# Allegro board AGET_ERNI2HRS.brd
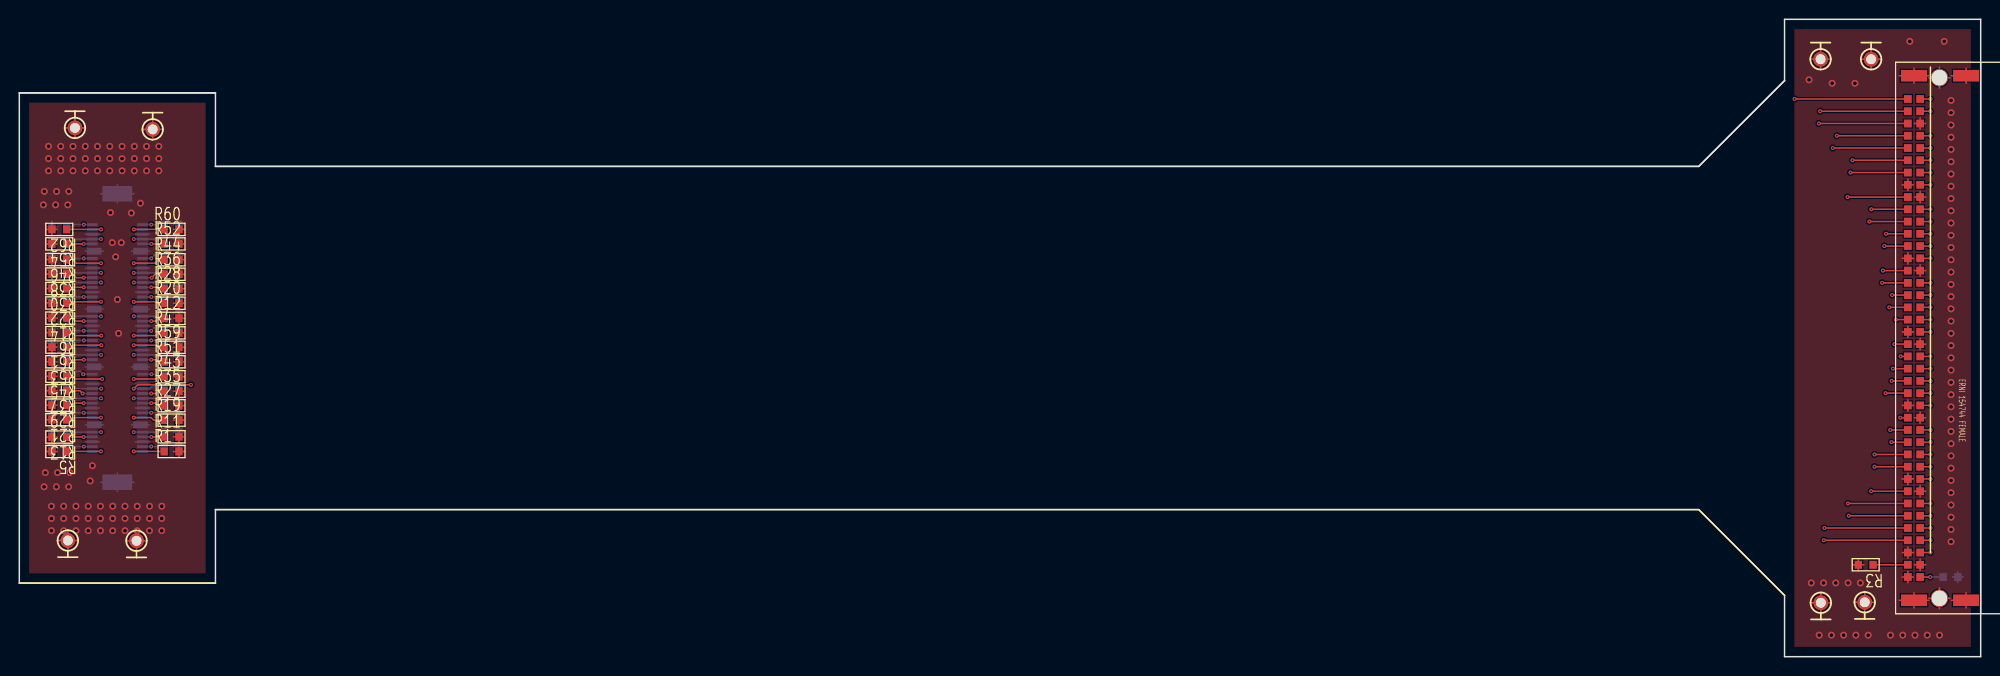
[diagram p0: board, top side]
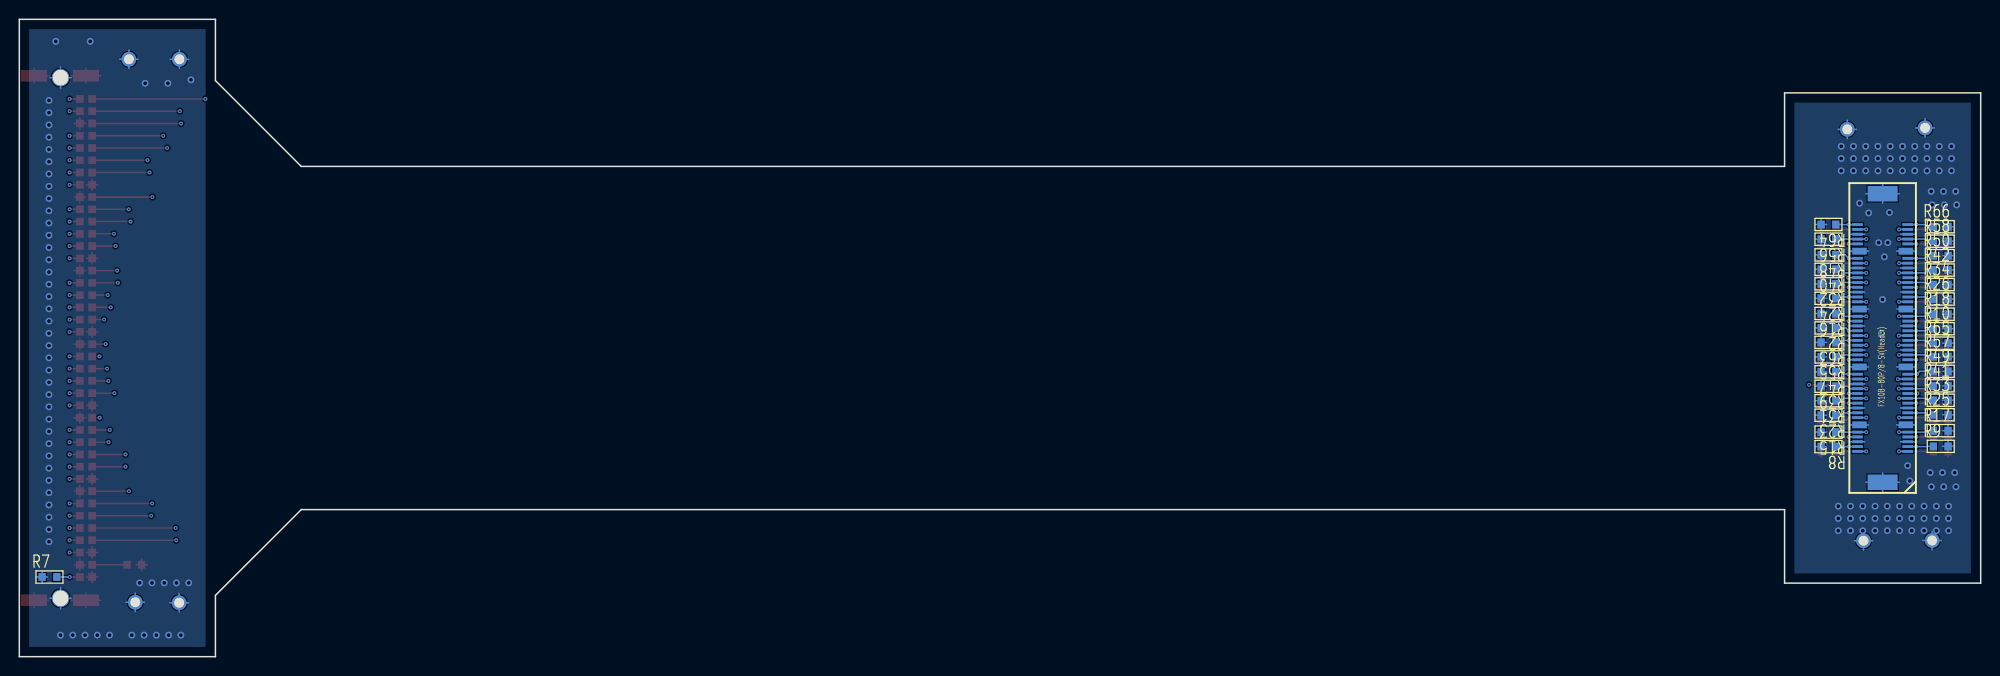
[diagram p1: board, bottom side, seen from below]

Outline 203.2 x 66.04 mm; copper layers: TOP, SIG1, GND1, GND2, SIG2, BOTTOM. Coordinates in mm from the lower left corner of the outline.
Outline path: 0,58.42 0,7.62 20.32,7.62 20.32,15.24 173.99,15.24 182.88,6.35 182.88,0 203.2,0 203.2,66.04 182.88,66.04 182.88,59.69 173.99,50.8 20.32,50.8 20.32,58.42 0,58.42

## Placement (name value [footprint] x y rotation side)
J1  CONN  [ERNI154744FEMALECONNECTOR]  196.93 57.78 0 top
R1  1M  [SR0603]  15.77 21.26 0 top
R2  1M  [SR0603]  15.77 34.06 0 bottom
R3  x  [SR0603]  191.29 9.53 180 top
R4  1M  [SR0603]  15.77 33.55 0 top
R5  1M  [SR0603]  4.14 21.26 180 top
R6  1M  [SR0603]  4.14 33.58 180 top
R7  x  [SR0603]  200.08 8.26 180 bottom
R8  1M  [SR0603]  15.77 21.77 0 bottom
R9  1M  [SR0603]  4.14 21.79 180 bottom
R10  1M  [SR0603]  4.14 33.99 180 bottom
R11  1M  [SR0603]  15.77 22.78 0 top
R12  1M  [SR0603]  15.77 35.05 0 top
R13  1M  [SR0603]  4.14 22.76 180 top
R14  1M  [SR0603]  4.14 35.08 180 top
R15  1M  [SR0603]  15.77 23.27 0 bottom
R16  1M  [SR0603]  15.77 35.56 0 bottom
R17  1M  [SR0603]  4.14 23.42 180 bottom
R18  1M  [SR0603]  4.14 35.48 180 bottom
R19  1M  [SR0603]  15.77 24.51 0 top
R20  1M  [SR0603]  15.77 36.63 0 top
R21  1M  [SR0603]  4.14 24.56 180 top
R22  1M  [SR0603]  4.14 36.65 180 top
R23  1M  [SR0603]  15.77 25.02 0 bottom
R24  1M  [SR0603]  15.77 37.13 0 bottom
R25  1M  [SR0603]  4.14 25.07 180 bottom
R26  1M  [SR0603]  4.14 37.06 180 bottom
R27  1M  [SR0603]  15.77 26.01 0 top
R28  1M  [SR0603]  15.77 38.13 0 top
R29  1M  [SR0603]  4.14 26.06 180 top
R30  1M  [SR0603]  4.14 38.15 180 top
R31  1M  [SR0603]  15.77 26.52 0 bottom
R32  1M  [SR0603]  15.77 38.63 0 bottom
R33  1M  [SR0603]  4.14 26.57 180 bottom
R34  1M  [SR0603]  4.14 38.56 180 bottom
R35  1M  [SR0603]  15.77 27.51 0 top
R36  1M  [SR0603]  15.77 39.62 0 top
R37  1M  [SR0603]  4.14 27.56 180 top
R38  1M  [SR0603]  4.14 39.65 180 top
R39  1M  [SR0603]  15.77 28.02 0 bottom
R40  1M  [SR0603]  15.77 40.13 0 bottom
R41  1M  [SR0603]  4.14 28.07 180 bottom
R42  1M  [SR0603]  4.14 40.06 180 bottom
R43  1M  [SR0603]  15.77 29.01 0 top
R44  1M  [SR0603]  15.77 41.12 0 top
R45  1M  [SR0603]  4.14 29.06 180 top
R46  1M  [SR0603]  4.14 41.15 180 top
R47  1M  [SR0603]  15.77 29.51 0 bottom
R48  1M  [SR0603]  15.77 41.63 0 bottom
R49  1M  [SR0603]  4.14 29.57 180 bottom
R50  1M  [SR0603]  4.14 41.55 180 bottom
R51  1M  [SR0603]  15.77 30.56 0 top
R52  1M  [SR0603]  15.77 42.77 0 top
R53  1M  [SR0603]  4.14 30.56 180 top
R54  1M  [SR0603]  4.14 42.77 180 top
R55  1M  [SR0603]  15.77 31.06 0 bottom
R56  1M  [SR0603]  15.77 43.26 0 bottom
R57  1M  [SR0603]  4.14 31.09 180 bottom
R58  1M  [SR0603]  4.14 43.05 180 bottom
R59  1M  [SR0603]  15.77 32.05 0 top
R60  1M  [SR0603]  15.77 44.27 0 top
R61  1M  [SR0603]  4.14 32.08 180 top
R62  1M  [SR0603]  4.14 44.27 180 top
R63  1M  [SR0603]  15.77 32.56 0 bottom
R64  1M  [SR0603]  15.77 44.78 0 bottom
R65  1M  [SR0603]  4.14 32.49 180 bottom
R66  1M  [SR0603]  4.14 44.55 180 bottom
TP1  GND  [TP_40MIL]  191.85 61.9 0 top
TP2  GND  [TP_40MIL]  5.03 12.04 180 top
TP3  GND  [TP_40MIL]  12.14 12.01 180 top
TP4  GND  [TP_40MIL]  5.77 54.79 0 top
TP5  GND  [TP_40MIL]  13.82 54.64 0 top
TP6  GND  [TP_40MIL]  186.61 61.9 0 top
TP7  GND  [TP_40MIL]  186.64 5.59 180 top
TP8  GND  [TP_40MIL]  191.19 5.64 180 top
U1  FX10B-80S8-SV-Header  [FX10B-80P8-SV-HEADER]  7.01 17.27 90 bottom

## Library data of the parts
J1 = CONN_1
R1 R2 R4-R6 R8-R66 = Resistor
R3 R7 = R
TP1-TP8 = T POINT A
U1 = FX10B-80S8-SV-Header

## Footprints (pads in the part's own frame, mm; a bottom-side part is the same pattern mirrored in y, then rotated)
ERNI154744FEMALECONNECTOR
  rect 2.7x1.199 smd: 1(-0.635,2.41) 2(4.765,2.41) 3(-0.635,-51.94) 4(4.765,-51.94)
  round 1.801 hole 1.6: 5(1.999,2.21) 6(1.999,-51.74)
  rect 0.8x0.8 smd: A1(0,-49.53) A2(0,-48.26) A3(0,-46.99) A4(0,-45.72) A5(0,-44.45) A6(0,-43.18) A7(0,-41.91) A8(0,-40.64) A9(0,-39.37) A10(0,-38.1) A11(0,-36.83) A12(0,-35.56) A13(0,-34.29) A14(0,-33.02) A15(0,-31.75) A16(0,-30.48) A17(0,-29.21) A18(0,-27.94) A19(0,-26.67) A20(0,-25.4) A21(0,-24.13) A22(0,-22.86) A23(0,-21.59) A24(0,-20.32) A25(0,-19.05) A26(0,-17.78) A27(0,-16.51) A28(0,-15.24) A29(0,-13.97) A30(0,-12.7) A31(0,-11.43) A32(0,-10.16) A33(0,-8.89) A34(0,-7.62) A35(0,-6.35) A36(0,-5.08) A37(0,-3.81) A38(0,-2.54) A39(0,-1.27) A40(0,0) B1(-1.27,-49.53) B2(-1.27,-48.26) B3(-1.27,-46.99) B4(-1.27,-45.72) B5(-1.27,-44.45) B6(-1.27,-43.18) B7(-1.27,-41.91) B8(-1.27,-40.64) B9(-1.27,-39.37) B10(-1.27,-38.1) B11(-1.27,-36.83) B12(-1.27,-35.56) B13(-1.27,-34.29) B14(-1.27,-33.02) B15(-1.27,-31.75) B16(-1.27,-30.48) B17(-1.27,-29.21) B18(-1.27,-27.94) B19(-1.27,-26.67) B20(-1.27,-25.4) B21(-1.27,-24.13) B22(-1.27,-22.86) B23(-1.27,-21.59) B24(-1.27,-20.32) B25(-1.27,-19.05) B26(-1.27,-17.78) B27(-1.27,-16.51) B28(-1.27,-15.24) B29(-1.27,-13.97) B30(-1.27,-12.7) B31(-1.27,-11.43) B32(-1.27,-10.16) B33(-1.27,-8.89) B34(-1.27,-7.62) B35(-1.27,-6.35) B36(-1.27,-5.08) B37(-1.27,-3.81) B38(-1.27,-2.54) B39(-1.27,-1.27) B40(-1.27,0)
FX10B-80P8-SV-HEADER
  rect 0.3x1.1 smd: 1(4,5.751) 2(4,0.551) 3(4.501,5.751) 4(4.501,0.551) 5(5.001,5.751) 6(5.001,0.551) 7(5.499,5.751) 8(5.499,0.551) 9(5.999,5.751) 10(5.999,0.551) 13(7.501,5.751) 14(7.501,0.551) 15(8.001,5.751) 16(8.001,0.551) 17(8.499,5.751) 18(8.499,0.551) 19(8.999,5.751) 20(8.999,0.551) 21(9.5,5.751) 22(9.5,0.551) 23(10,5.751) 24(10,0.551) 25(10.5,5.751) 26(10.5,0.551) 27(11.001,5.751) 28(11.001,0.551) 29(11.501,5.751) 30(11.501,0.551) 31(11.999,5.751) 32(11.999,0.551) 35(13.5,5.751) 36(13.5,0.551) 37(14,5.751) 38(14,0.551) 39(14.501,5.751) 40(14.501,0.551) 41(15.001,5.751) 42(15.001,0.551) 43(15.499,5.751) 44(15.499,0.551) 45(15.999,5.751) 46(15.999,0.551) 47(16.5,5.751) 48(16.5,0.551) 49(17,5.751) 50(17,0.551) 51(17.501,5.751) 52(17.501,0.551) 53(18.001,5.751) 54(18.001,0.551) 57(19.5,5.751) 58(19.5,0.551) 59(20,5.751) 60(20,0.551) 61(20.5,5.751) 62(20.5,0.551) 63(21.001,5.751) 64(21.001,0.551) 65(21.501,5.751) 66(21.501,0.551) 67(21.999,5.751) 68(21.999,0.551) 69(22.499,5.751) 70(22.499,0.551) 71(23,5.751) 72(23,0.551) 73(23.5,5.751) 74(23.5,0.551) 75(24,5.751) 76(24,0.551) 79(25.499,5.751) 80(25.499,0.551) 81(25.999,5.751) 82(25.999,0.551) 83(26.5,5.751) 84(26.5,0.551) 85(27,5.751) 86(27,0.551) 87(27.501,5.751) 88(27.501,0.551)
  rect 0.701x1.501 smd: 11(6.749,5.55) 12(6.749,0.749) 33(12.751,5.55) 34(12.751,0.749) 55(18.75,5.55) 56(18.75,0.749) 77(24.75,5.55) 78(24.75,0.749)
  rect 1.6x3.099 smd: B1(0.8,3.15) B2(30.701,3.15)
SR0603
  rect 0.762x0.813 smd: 1(-0.762,0) 2(0.762,0)
TP_40MIL
  round 1.524 hole 1.016: 1(0,0)

## Nets
GND: J1.1(GND#1) J1.2(GND#2) J1.3(GND#3) J1.4(GND#4) J1.5(GND#5) J1.6(GND#6) J1.A2 J1.A8 J1.A14 J1.A20 J1.A26 J1.A32 J1.A38 J1.B1 J1.B3 J1.B9 J1.B15 J1.B21 J1.B27 J1.B33 R1.2 R2.2 R3.2 R4.2 R5.2 R6.2 R7.1 R8.2 R9.2 R10.2 R11.2 R12.2 R13.2 R14.2 R15.2 R16.2 R17.2 R18.2 R19.2 R20.2 R21.2 R22.2 R23.2 R24.2 R25.2 R26.2 R27.2 R28.2 R29.2 R30.2 R31.2 R32.2 R33.2 R34.2 R35.2 R36.2 R37.2 R38.2 R39.2 R40.2 R41.2 R42.2 R43.2 R44.2 R45.2 R46.2 R47.2 R48.2 R49.2 R50.2 R51.2 R52.2 R53.2 R54.2 R55.2 R56.2 R57.2 R58.2 R59.2 R60.2 R61.2 R62.2 R63.2 R64.2 R65.2 R66.2 TP1.1(TP) TP2.1(TP) TP3.1(TP) TP4.1(TP) TP5.1(TP) TP6.1(TP) TP7.1(TP) TP8.1(TP) U1.5 U1.6 U1.11(GND1) U1.12(GND1-1) U1.17 U1.18 U1.27 U1.28 U1.33(GND2) U1.34(GND2-2) U1.39 U1.40 U1.49 U1.50 U1.55(GND3) U1.56(GND3-3) U1.61 U1.62 U1.71 U1.72 U1.77(GND4) U1.78(GND4-4) U1.83 U1.84 U1.B1(PAD1) U1.B2(PAD2)
INA_01: J1.A3 R1.1 U1.1
INA_02: J1.B4 R5.1 U1.2
INA_03: J1.A4 R8.1 U1.3
INA_04: J1.B5 R9.1 U1.4
INA_05: J1.A5 R11.1 U1.7
INA_06: J1.B6 R13.1 U1.8
INA_07: J1.A6 R15.1 U1.9
INA_08: J1.B7 R17.1 U1.10
INA_09: J1.A7 R19.1 U1.13
INA_10: J1.B8 R21.1 U1.14
INA_11: J1.A9 R23.1 U1.15
INA_12: J1.B10 R25.1 U1.16
INA_13: J1.A10 R27.1 U1.19
INA_14: J1.B11 R29.1 U1.20
INA_15: J1.A11 R31.1 U1.21
INA_16: J1.B12 R33.1 U1.22
INA_17: J1.A12 R35.1 U1.23
INA_18: J1.B13 R37.1 U1.24
INA_19: J1.A13 R39.1 U1.25
INA_20: J1.B14 R41.1 U1.26
INA_21: J1.A15 R43.1 U1.29
INA_22: J1.B16 R45.1 U1.30
INA_23: J1.A16 R47.1 U1.31
INA_24: J1.B17 R49.1 U1.32
INA_25: J1.A17 R51.1 U1.35
INA_26: J1.B18 R53.1 U1.36
INA_27: J1.A18 R55.1 U1.37
INA_28: J1.B19 R57.1 U1.38
INA_29: J1.A19 R59.1 U1.41
INA_30: J1.B20 R61.1 U1.42
INA_31: J1.A21 R63.1 U1.43
INA_32: J1.B22 R65.1 U1.44
INA_33: J1.A22 R4.1 U1.45
INA_34: J1.B23 R6.1 U1.46
INA_35: J1.A23 R2.1 U1.47
INA_36: J1.B24 R10.1 U1.48
INA_37: J1.A24 R12.1 U1.51
INA_38: J1.B25 R14.1 U1.52
INA_39: J1.A25 R16.1 U1.53
INA_40: J1.B26 R18.1 U1.54
INA_41: J1.A27 R20.1 U1.57
INA_42: J1.B28 R22.1 U1.58
INA_43: J1.A28 R24.1 U1.59
INA_44: J1.B29 R26.1 U1.60
INA_45: J1.A29 R28.1 U1.63
INA_46: J1.B30 R30.1 U1.64
INA_47: J1.A30 R32.1 U1.65
INA_48: J1.B31 R34.1 U1.66
INA_49: J1.A31 R36.1 U1.67
INA_50: J1.B32 R38.1 U1.68
INA_51: J1.A33 R40.1 U1.69
INA_52: J1.B34 R42.1 U1.70
INA_53: J1.A34 R44.1 U1.73
INA_54: J1.B35 R46.1 U1.74
INA_55: J1.A35 R48.1 U1.75
INA_56: J1.B36 R50.1 U1.76
INA_57: J1.A36 R52.1 U1.79
INA_58: J1.B37 R54.1 U1.80
INA_59: J1.A37 R56.1 U1.81
INA_60: J1.B38 R58.1 U1.82
INA_61: J1.A39 R60.1 U1.85
INA_62: J1.B39 R62.1 U1.86
INA_63: J1.A40 R64.1 U1.87
INA_64: J1.B40 R66.1 U1.88
N01819: J1.A1 R7.2
N01997: J1.B2 R3.1

## Via types
v1: diameter 0.406, hole 0.203, TOP to BOTTOM, 130 vias
v2: diameter 0.711, hole 0.406, TOP to BOTTOM, 139 vias

## Routing (per net, layer and track width the routed paths; a pad name or vN(x,y) marks a point on that pad's centre or on a via; arc(x,y) is an arc through that point)
GND: length 325.2
  TOP w0.152: 3.38,26.97 R37.2 ; R37.2 2.82,27.56 ; R37.2 3.94,27.56 ; R37.2 3.38,28.15 ; 2.82,38.15 R30.2 ; R30.2 3.38,37.56 ; R30.2 3.38,38.74 ; R30.2 3.94,38.15 ; J1.B21 195.66,34.24 ; J1.B21 196.24,33.66 ; J1.B21 195.66,33.07 ; J1.B21 195.07,33.66 ; 15.97,33.55 R4.2 ; R4.2 17.1,33.55 ; R4.2 16.54,32.97 ; R4.2 16.54,34.14 ; TP1.1 191.85,62.84 ; TP1.1 192.79,61.9 ; TP1.1 190.9,61.9 ; TP1.1 191.85,60.96 ; R13.2 3.94,22.76 ; R13.2 3.38,23.35 ; R13.2 3.38,22.17 ; R13.2 2.82,22.76 ; R28.2 16.54,38.71 ; R28.2 15.97,38.13 ; R28.2 16.54,37.54 ; R28.2 17.1,38.13 ; 16.54,34.47 R12.2 ; R12.2 16.54,35.64 ; R12.2 15.97,35.05 ; R12.2 17.1,35.05 ; 185.7,5.59 TP7.1 ; TP7.1 187.58,5.59 ; TP7.1 186.64,6.53 ; TP7.1 186.64,4.65 ; R36.2 17.1,39.62 ; R36.2 15.97,39.62 ; R36.2 16.54,40.21 ; R36.2 16.54,39.04 ; 16.54,40.54 R44.2 ; R44.2 15.97,41.12 ; R44.2 17.1,41.12 ; R44.2 16.54,41.71 ; R59.2 17.1,32.05 ; R59.2 15.97,32.05 ; R59.2 16.54,32.64 ; R59.2 16.54,31.47 ; 195.66,10.79 196.24,10.79 ; 195.66,10.79 195.66,10.21 ; 195.66,10.79 195.66,11.38 ; 195.66,10.79 195.07,10.79 ; TP5.1 13.82,55.58 ; TP5.1 12.88,54.64 ; TP5.1 13.82,53.69 ; TP5.1 14.76,54.64 ; J1.3 196.29,6.62 ; J1.3 194.76,5.84 ; J1.3 197.82,5.84 ; J1.3 196.29,5.06 ; 2.82,24.56 R21.2 ; R21.2 3.38,23.98 ; R21.2 3.94,24.56 ; R21.2 3.38,25.15 ; 196.93,24.18 J1.A14 ; J1.A14 196.34,24.77 ; J1.A14 196.93,25.35 ; J1.A14 197.51,24.77 ; 3.38,40.56 R46.2 ; R46.2 3.94,41.15 ; R46.2 2.82,41.15 ; R46.2 3.38,41.73 ; R22.2 3.94,36.65 ; R22.2 2.82,36.65 ; R22.2 3.38,37.24 ; R22.2 3.38,36.07 ; 16.54,25.42 R27.2 ; R27.2 16.54,26.6 ; R27.2 15.97,26.01 ; R27.2 17.1,26.01 ; 16.54,22.2 R11.2 ; R11.2 15.97,22.78 ; R11.2 17.1,22.78 ; R11.2 16.54,23.37 ; 16.54,29.97 R51.2 ; R51.2 17.1,30.56 ; R51.2 16.54,31.14 ; R51.2 15.97,30.56 ; J1.A2 196.93,10.11 ; J1.A2 196.93,8.94 ; J1.A2 196.34,9.53 ; J1.A2 197.51,9.53 ; 3.38,39.06 R38.2 ; R38.2 2.82,39.65 ; R38.2 3.38,40.24 ; R38.2 3.94,39.65 ; R62.2 3.94,44.27 ; R62.2 3.38,44.86 ; R62.2 2.82,44.27 ; R62.2 3.38,43.69 ; 3.38,20.67 R5.2 ; R5.2 2.82,21.26 ; R5.2 3.94,21.26 ; R5.2 3.38,21.85 ; 189.96,9.53 R3.2 ; R3.2 190.53,10.11 ; R3.2 191.09,9.53 ; R3.2 190.53,8.94 ; 195.66,8.26 196.24,8.26 ; 195.66,8.26 195.07,8.26 ; 195.66,8.26 195.66,7.67 ; 195.66,8.26 195.66,8.84 ; 197.84,6.05 J1.6 ; J1.6 198.93,4.96 ; J1.6 198.93,7.13 ; J1.6 200.01,6.05 ; 195.66,48.9 196.24,48.9 ; 195.66,48.9 195.66,48.31 ; 195.66,48.9 195.66,49.48 ; 195.66,48.9 195.07,48.9 ; 16.54,23.92 R19.2 ; R19.2 17.1,24.51 ; R19.2 15.97,24.51 ; R19.2 16.54,25.1 ; 16.54,43.69 R60.2 ; R60.2 15.97,44.27 ; R60.2 17.1,44.27 ; R60.2 16.54,44.86 ; R43.2 16.54,29.59 ; R43.2 15.97,29.01 ; R43.2 17.1,29.01 ; R52.2 17.1,42.77 ; R52.2 15.97,42.77 ; R52.2 16.54,42.19 ; R52.2 16.54,43.36 ; 2.82,33.58 R6.2 ; R6.2 3.94,33.58 ; R6.2 3.38,34.17 ; R6.2 3.38,32.99 ; R54.2 3.38,43.36 ; R54.2 3.38,42.19 ; R54.2 3.94,42.77 ; R54.2 2.82,42.77 ; R53.2 3.94,30.56 ; R53.2 2.82,30.56 ; R53.2 3.38,31.14 ; R53.2 3.38,29.97 ; J1.A38 196.93,55.83 ; J1.A38 197.51,55.24 ; J1.A38 196.34,55.24 ; J1.A38 196.93,54.66 ; 2.82,26.06 R29.2 ; R29.2 3.38,25.47 ; R29.2 3.38,26.65 ; R29.2 3.94,26.06 ; 3.38,34.49 R14.2 ; R14.2 2.82,35.08 ; R14.2 3.38,35.66 ; R14.2 3.94,35.08 ; 195.66,25.45 195.66,26.04 ; 195.66,26.04 196.24,26.04 ; 195.66,26.04 195.07,26.04 ; 195.66,26.04 195.66,26.62 ; TP4.1 6.71,54.79 ; TP4.1 5.77,53.85 ; TP4.1 4.82,54.79 ; TP4.1 5.77,55.73 ; 15.97,36.63 R20.2 ; R20.2 16.54,36.04 ; R20.2 17.1,36.63 ; R20.2 16.54,37.21 ; 195.66,41.27 195.66,41.86 ; 195.66,41.27 195.66,40.69 ; 195.66,41.27 196.24,41.27 ; 195.66,41.27 195.07,41.27 ; 16.54,26.92 R35.2 ; R35.2 15.97,27.51 ; R35.2 17.1,27.51 ; J1.5 198.93,61.08 ; J1.5 200.01,59.99 ; J1.5 198.93,58.91 ; J1.5 197.84,59.99 ; 15.97,21.26 R1.2 ; R1.2 17.1,21.26 ; R1.2 16.54,21.85 ; R1.2 16.54,20.67 ; 5.03,11.1 TP2.1 ; TP2.1 5.03,12.98 ; TP2.1 4.09,12.04 ; TP2.1 5.97,12.04 ; 196.34,32.38 J1.A20 ; J1.A20 196.93,32.97 ; J1.A20 197.51,32.38 ; J1.A20 196.93,31.8 ; 196.93,39.42 J1.A26 ; J1.A26 196.34,40.01 ; J1.A26 197.51,40.01 ; J1.A26 196.93,40.59 ; 3.38,28.47 R45.2 ; R45.2 3.38,29.64 ; R45.2 3.94,29.06 ; R45.2 2.82,29.06 ; TP6.1 186.61,62.84 ; TP6.1 185.67,61.9 ; TP6.1 186.61,60.96 ; TP6.1 187.56,61.9 ; 200.16,5.84 J1.4 ; J1.4 201.69,6.62 ; J1.4 201.69,5.06 ; 2.82,32.08 R61.2 ; R61.2 3.94,32.08 ; R61.2 3.38,31.49 ; R61.2 3.38,32.67 ; J1.1 196.29,60.98 ; J1.1 194.76,60.2 ; J1.1 197.82,60.2 ; J1.1 196.29,59.42 ; TP8.1 191.19,6.58 ; TP8.1 192.13,5.64 ; TP8.1 191.19,4.7 ; TP8.1 190.24,5.64 ; 196.93,16.56 J1.A8 ; J1.A8 196.93,17.73 ; J1.A8 197.51,17.14 ; J1.A8 196.34,17.14 ; J1.B9 195.66,19 ; J1.B9 195.07,18.41 ; J1.B9 195.66,17.83 ; J1.B9 196.24,18.41 ; 201.69,59.42 J1.2 ; J1.2 201.69,60.98 ; J1.2 200.16,60.2 ; 11.2,12.01 TP3.1 ; TP3.1 13.08,12.01 ; TP3.1 12.14,11.07 ; TP3.1 12.14,12.96 ; J1.A32 197.51,47.62 ; J1.A32 196.93,48.21 ; J1.A32 196.93,47.04 ; J1.A32 196.34,47.62
  BOTTOM w0.152: 8.69,30.02 U1.34 6.83,30.02 ; 3.38,27.48 R41.2 ; R41.2 3.94,28.07 ; R41.2 2.82,28.07 ; R41.2 3.38,28.65 ; 2.82,31.09 R57.2 ; R57.2 3.38,31.68 ; R57.2 3.38,30.5 ; R57.2 3.94,31.09 ; 10.16,17.09 U1.B1 ; U1.B1 11.89,18.07 ; U1.B1 8.43,18.07 ; U1.B1 10.16,19.05 ; 16.54,34.97 R16.2 ; R16.2 16.54,36.15 ; R16.2 17.1,35.56 ; R16.2 15.97,35.56 ; R65.2 3.94,32.49 ; R65.2 3.38,31.9 ; R65.2 2.82,32.49 ; R65.2 3.38,33.07 ; 12.03,34.27 U1.49 13.49,34.27 ; 13.49,40.27 U1.71 12.03,40.27 ; 3.38,42.47 R58.2 ; R58.2 2.82,43.05 ; R58.2 3.38,43.64 ; R58.2 3.94,43.05 ; R32.2 16.54,39.22 ; R32.2 15.97,38.63 ; R32.2 17.1,38.63 ; R32.2 16.54,38.05 ; 11.63,36.02 U1.55 13.49,36.02 ; R34.2 3.94,38.56 ; R34.2 2.82,38.56 ; R34.2 3.38,39.14 ; R34.2 3.38,37.97 ; 15.97,21.77 R8.2 ; R8.2 16.54,21.18 ; R8.2 17.1,21.77 ; R8.2 16.54,22.35 ; 11.2,12.01 TP3.1 ; TP3.1 13.08,12.01 ; TP3.1 12.14,11.07 ; TP3.1 12.14,12.96 ; 6.83,42.02 U1.78 8.69,42.02 ; 200.84,7.67 R7.1 ; R7.1 200.84,8.84 ; R7.1 201.4,8.26 ; R7.1 200.28,8.26 ; R9.2 3.38,22.38 ; R9.2 3.94,21.79 ; R9.2 2.82,21.79 ; R9.2 3.38,21.21 ; TP4.1 6.71,54.79 ; TP4.1 5.77,55.73 ; TP4.1 5.77,53.85 ; TP4.1 4.82,54.79 ; 6.83,40.27 U1.72 8.29,40.27 ; TP1.1 191.85,62.84 ; TP1.1 190.9,61.9 ; TP1.1 192.79,61.9 ; TP1.1 191.85,60.96 ; 15.97,34.06 R2.2 ; R2.2 17.1,34.06 ; R2.2 16.54,34.65 ; R2.2 16.54,33.47 ; 15.97,25.02 R23.2 ; R23.2 16.54,24.43 ; R23.2 17.1,25.02 ; R23.2 16.54,25.61 ; 3.38,24.48 R25.2 ; R25.2 2.82,25.07 ; R25.2 3.94,25.07 ; R25.2 3.38,25.66 ; 3.38,43.96 R66.2 ; R66.2 2.82,44.55 ; R66.2 3.38,45.14 ; R66.2 3.94,44.55 ; 8.29,28.27 U1.28 6.83,28.27 ; 2.82,33.99 R10.2 ; R10.2 3.38,33.4 ; R10.2 3.38,34.57 ; R10.2 3.94,33.99 ; 4.09,12.04 TP2.1 ; TP2.1 5.03,12.98 ; TP2.1 5.03,11.1 ; TP2.1 5.97,12.04 ; R15.2 16.54,23.85 ; R15.2 17.1,23.27 ; R15.2 15.97,23.27 ; R15.2 16.54,22.68 ; R42.2 3.38,40.64 ; R42.2 3.38,39.47 ; R42.2 2.82,40.06 ; R42.2 3.94,40.06 ; R26.2 3.38,37.65 ; R26.2 3.38,36.47 ; R26.2 2.82,37.06 ; R26.2 3.94,37.06 ; 198.93,58.91 J1.5 ; J1.5 200.01,59.99 ; J1.5 197.84,59.99 ; J1.5 198.93,61.08 ; R31.2 17.1,26.52 ; R31.2 16.54,25.93 ; R31.2 15.97,26.52 ; R31.2 16.54,27.1 ; 13.49,30.02 U1.33 11.63,30.02 ; R56.2 17.1,43.26 ; R56.2 16.54,43.84 ; R56.2 15.97,43.26 ; R56.2 16.54,42.67 ; 15.97,41.63 R48.2 ; R48.2 16.54,42.22 ; R48.2 17.1,41.63 ; R48.2 16.54,41.04 ; 3.38,28.98 R49.2 ; R49.2 2.82,29.57 ; R49.2 3.38,30.15 ; R49.2 3.94,29.57 ; 6.83,31.77 U1.40 8.29,31.77 ; 16.54,30.48 R55.2 ; R55.2 15.97,31.06 ; R55.2 16.54,31.65 ; R55.2 17.1,31.06 ; 13.49,42.02 U1.77 11.63,42.02 ; R33.2 3.38,27.16 ; R33.2 2.82,26.57 ; R33.2 3.94,26.57 ; R33.2 3.38,25.98 ; 6.83,24.02 U1.12 8.69,24.02 ; U1.B2 10.16,48.95 ; U1.B2 8.43,47.97 ; U1.B2 11.89,47.97 ; U1.B2 10.16,46.99 ; R64.2 16.54,45.37 ; R64.2 15.97,44.78 ; R64.2 16.54,44.19 ; R64.2 17.1,44.78 ; 12.03,37.77 U1.61 13.49,37.77 ; R24.2 17.1,37.13 ; R24.2 15.97,37.13 ; R24.2 16.54,37.72 ; R24.2 16.54,36.55 ; 8.29,37.77 U1.62 6.83,37.77 ; TP6.1 187.56,61.9 ; TP6.1 185.67,61.9 ; TP6.1 186.61,60.96 ; TP6.1 186.61,62.84 ; 8.29,25.77 U1.18 6.83,25.77 ; R47.2 17.1,29.51 ; R47.2 16.54,28.93 ; R47.2 16.54,30.1 ; R47.2 15.97,29.51 ; 190.24,5.64 TP8.1 ; TP8.1 191.19,4.7 ; TP8.1 191.19,6.58 ; TP8.1 192.13,5.64 ; R18.2 3.94,35.48 ; R18.2 3.38,34.9 ; R18.2 2.82,35.48 ; R18.2 3.38,36.07 ; R39.2 17.1,28.02 ; R39.2 16.54,27.43 ; R39.2 16.54,28.6 ; R39.2 15.97,28.02 ; R17.2 3.38,24.01 ; R17.2 2.82,23.42 ; R17.2 3.38,22.83 ; R17.2 3.94,23.42 ; 13.49,31.77 U1.39 12.03,31.77 ; R63.2 16.54,33.15 ; R63.2 17.1,32.56 ; R63.2 15.97,32.56 ; R63.2 16.54,31.98 ; 6.83,43.77 U1.84 8.29,43.77 ; 12.03,43.77 U1.83 13.49,43.77 ; 12.03,28.27 U1.27 13.49,28.27 ; 2.82,41.55 R50.2 ; R50.2 3.94,41.55 ; R50.2 3.38,40.97 ; R50.2 3.38,42.14 ; 8.29,22.27 U1.6 6.83,22.27 ; 12.03,22.27 U1.5 13.49,22.27 ; 185.7,5.59 TP7.1 ; TP7.1 186.64,6.53 ; TP7.1 186.64,4.65 ; TP7.1 187.58,5.59 ; 12.88,54.64 TP5.1 ; TP5.1 13.82,55.58 ; TP5.1 13.82,53.69 ; TP5.1 14.76,54.64 ; 6.83,36.02 U1.56 8.69,36.02 ; 13.49,24.02 U1.11 11.63,24.02 ; 6.83,34.27 U1.50 8.29,34.27 ; 13.49,25.77 U1.17 12.03,25.77 ; 197.84,6.05 J1.6 ; J1.6 198.93,7.13 ; J1.6 200.01,6.05 ; J1.6 198.93,4.96 ; 15.97,40.13 R40.2 ; R40.2 16.54,39.55 ; R40.2 17.1,40.13 ; R40.2 16.54,40.72
  vias: v2(2.49,46.81) v2(2.59,48.21) v2(2.57,17.6) v2(2.69,19.08) v2(3.02,52.88) v2(3.02,51.61) v2(3.02,50.34) v2(3.33,15.6) v2(3.33,14.33) v2(3.33,13.06) v2(3.76,46.81) v2(3.84,17.6) v2(3.86,48.21) v2(3.96,19.08) v2(4.29,52.88) v2(4.29,51.61) v2(4.29,50.34) v2(4.6,15.6) v2(4.6,14.33) v2(4.6,13.06) v2(5.03,46.81) v2(5.13,48.21) v2(5.11,17.6) v2(5.23,19.08) v2(5.56,52.88) v2(5.56,51.61) v2(5.56,50.34) v2(5.87,15.6) v2(5.87,14.33) v2(5.87,13.06) v2(6.83,52.88) v2(6.83,51.61) v2(6.83,50.34) v2(7.14,15.6) v2(7.14,14.33) v2(7.14,13.06) v2(7.34,18.21) v2(7.57,19.79) v2(8.1,52.88) v2(8.1,51.61) v2(8.1,50.34) v2(8.41,15.6) v2(8.41,14.33) v2(8.41,13.06) v2(9.37,52.88) v2(9.37,51.61) v2(9.37,50.34) v2(9.45,46.02) v2(9.63,42.9) v2(9.68,15.6) v2(9.68,14.33) v2(9.68,13.06) v2(9.98,41.43) v2(10.16,37.01) v2(10.29,33.5) v2(10.64,52.88) v2(10.64,51.61) v2(10.64,50.34) v2(10.57,42.9) v2(10.95,15.6) v2(10.95,14.33) v2(10.95,13.06) v2(11.61,45.97) v2(11.91,52.88) v2(11.91,51.61) v2(11.91,50.34) v2(12.22,15.6) v2(12.22,14.33) v2(12.22,13.06) v2(12.55,46.99) v2(13.18,52.88) v2(13.18,51.61) v2(13.18,50.34) v2(13.49,15.6) v2(13.49,14.33) v2(13.49,13.06) v2(14.45,52.88) v2(14.45,51.61) v2(14.45,50.34) v2(14.76,15.6) v2(14.76,14.33) v2(14.76,13.06) v2(185.42,59.77) v2(185.65,7.65) v2(186.46,2.24) v2(186.92,7.65) v2(187.73,2.24) v2(187.81,59.41) v2(188.19,7.65) v2(189,2.24) v2(189.46,7.65) v2(190.17,59.41) v2(190.27,2.24) v2(190.73,7.65) v2(191.54,2.24) v2(193.85,2.24) v2(195.12,2.24) v2(195.86,63.75) v2(196.39,2.24) v2(197.66,2.24) v2(198.93,2.24) v2(199.42,63.75) v2(200.13,57.63) v2(200.13,56.36) v2(200.13,55.09) v2(200.13,53.82) v2(200.13,52.55) v2(200.13,51.28) v2(200.13,50.01) v2(200.13,48.74) v2(200.13,47.47) v2(200.13,46.2) v2(200.13,44.93) v2(200.13,43.66) v2(200.13,42.39) v2(200.13,41.12) v2(200.13,39.85) v2(200.13,38.58) v2(200.13,37.31) v2(200.13,36.04) v2(200.13,34.77) v2(200.13,33.5) v2(200.13,32.23) v2(200.13,30.96) v2(200.13,29.69) v2(200.13,28.42) v2(200.13,27.15) v2(200.13,25.88) v2(200.13,24.61) v2(200.13,23.34) v2(200.13,22.07) v2(200.13,20.8) v2(200.13,19.53) v2(200.13,18.26) v2(200.13,16.99) v2(200.13,15.72) v2(200.13,14.45) v2(200.13,13.18) v2(200.13,11.91)
INA_01: length 195.6
  TOP w0.152: v1(11.86,21.27) 14.42,21.27 14.43,21.26 R1.1 ; v1(197.99,10.79) 196.93,10.79
  SIG1 w0.152: v1(197.99,10.79) 186.66,10.79 178.82,18.64 14.49,18.64 v1(11.86,21.27)
  BOTTOM w0.152: U1.1 v1(11.86,21.27)
INA_02: length 195.5
  TOP w0.152: v1(8.46,21.27) 5.5,21.27 5.49,21.26 R5.1 ; v1(186.94,12.06) J1.B4
  SIG2 w0.152: v1(186.94,12.06) 181.08,17.93 11.8,17.93 v1(8.46,21.27)
  BOTTOM w0.152: U1.2 v1(8.46,21.27)
INA_03: length 191.7
  TOP w0.152: J1.A4 v1(197.99,12.06)
  SIG2 w0.152: v1(13.67,21.77) 16.36,19.08 182.4,19.08 189.41,12.06 v1(197.99,12.06)
  BOTTOM w0.152: U1.3 v1(13.67,21.77) 14.42,21.77 14.43,21.77 R8.1
INA_04: length 195.1
  TOP w0.152: v1(186.99,13.34) 195.66,13.34
  SIG1 w0.152: v1(6.68,21.77) 12.67,21.77 14.99,19.46 180.87,19.46 v1(186.99,13.34)
  BOTTOM w0.152: U1.4 v1(6.68,21.77) 5.51,21.77 5.49,21.79 R9.1
INA_05: length 191.6
  TOP w0.152: R11.1 14.43,22.78 14.41,22.77 v1(13.67,22.77) ; v1(197.99,13.34) 196.93,13.34
  SIG1 w0.152: v1(197.99,13.34) 189.33,13.34 182.12,20.55 15.89,20.55 v1(13.67,22.77)
  BOTTOM w0.152: U1.7 v1(13.67,22.77)
INA_06: length 195
  TOP w0.152: v1(189.53,14.61) J1.B6 ; R13.1 5.49,22.76 5.5,22.77 v1(6.68,22.77)
  SIG2 w0.152: v1(189.53,14.61) 184.1,20.04 17.12,20.04 14.88,22.28 7.17,22.28 v1(6.68,22.77)
  BOTTOM w0.152: U1.8 v1(6.68,22.77)
INA_07: length 193.9
  TOP w0.152: v1(197.99,14.61) J1.A6
  SIG2 w0.152: v1(197.99,14.61) 191.97,14.61 185.55,21.03 17.96,21.03 15.72,23.27 v1(11.86,23.27)
  BOTTOM w0.152: R15.1 14.43,23.27 14.42,23.27 U1.9 v1(11.86,23.27)
INA_08: length 194.4
  TOP w0.152: J1.B7 v1(189.43,15.88)
  SIG1 w0.152: v1(8.46,23.27) 11,23.27 11.68,23.95 13.77,23.95 16.26,21.46 183.85,21.46 v1(189.43,15.88)
  BOTTOM w0.152: R17.1 5.49,23.42 5.64,23.27 U1.10 v1(8.46,23.27)
INA_09: length 195
  TOP w0.152: v1(197.99,15.88) J1.A7 ; R19.1 13.92,24.51 13.66,24.77 v1(11.86,24.77)
  SIG1 w0.152: v1(11.86,24.77) 14.7,24.77 17.12,22.35 185.57,22.35 192.05,15.88 v1(197.99,15.88)
  BOTTOM w0.152: U1.13 v1(11.86,24.77)
INA_10: length 194.9
  TOP w0.152: v1(8.46,24.77) 5.69,24.77 5.49,24.56 R21.1 ; v1(191.85,17.14) J1.B8
  SIG2 w0.152: v1(191.85,17.14) 187.02,21.97 18.59,21.97 16.38,24.18 9.05,24.18 v1(8.46,24.77)
  BOTTOM w0.152: U1.14 v1(8.46,24.77)
INA_11: length 190.6
  TOP w0.152: v1(197.99,18.41) J1.A9
  SIG2 w0.152: v1(13.67,25.27) 16.94,25.27 19.35,22.86 187.55,22.86 192,18.41 v1(197.99,18.41)
  BOTTOM w0.152: R23.1 14.43,25.02 14.18,25.27 v1(13.67,25.27) U1.15
INA_12: length 194.4
  TOP w0.152: v1(192.2,19.68) J1.B10
  SIG1 w0.152: v1(6.68,25.27) 11.94,25.27 12.37,25.7 15.42,25.7 17.7,23.42 188.47,23.42 v1(192.2,19.68)
  BOTTOM w0.152: R25.1 5.49,25.07 5.69,25.27 v1(6.68,25.27) U1.16
INA_13: length 190.5
  TOP w0.152: R27.1 14.43,26.01 14.17,26.27 v1(13.67,26.27) ; v1(197.99,19.68) J1.A10
  SIG1 w0.152: v1(13.67,26.27) 16.23,26.27 18.14,24.36 190.07,24.36 194.74,19.68 v1(197.99,19.68)
  BOTTOM w0.152: U1.19 v1(13.67,26.27)
INA_14: length 193.9
  TOP w0.152: R29.1 5.49,26.06 5.69,26.27 v1(6.68,26.27) ; v1(192.2,20.95) J1.B11
  SIG2 w0.152: v1(6.68,26.27) 7.19,25.76 17.91,25.76 19.76,23.9 189.26,23.9 v1(192.2,20.95)
  BOTTOM w0.152: U1.20 v1(6.68,26.27)
INA_15: length 192.9
  TOP w0.152: v1(197.99,20.95) J1.A11
  SIG2 w0.152: v1(197.99,20.95) 194.44,20.95 190.5,24.89 20.09,24.89 18.22,26.77 v1(11.86,26.77)
  BOTTOM w0.152: R31.1 14.43,26.52 14.18,26.77 U1.21 v1(11.86,26.77)
INA_16: length 193
  TOP w0.152: v1(193.95,22.23) J1.B12
  SIG1 w0.152: v1(193.95,22.23) 190.83,25.35 18.82,25.35 17.47,26.7 12.41,26.7 12.04,26.34 8.89,26.34 v1(8.46,26.77)
  BOTTOM w0.152: v1(8.46,26.77) U1.22 5.69,26.77 5.49,26.57 R33.1
INA_17: length 189.8
  TOP w0.152: v1(197.99,22.23) J1.A12 ; v1(13.67,27.27) 14.19,27.27 14.43,27.51 R35.1
  SIG1 w0.152: v1(13.67,27.27) 18.3,27.27 19.41,26.16 191.92,26.16 195.86,22.23 v1(197.99,22.23)
  BOTTOM w0.152: U1.23 v1(13.67,27.27)
INA_18: length 193.8
  TOP w0.152: v1(6.56,27.27) 6.27,27.56 R37.1 ; 195.66,23.5 v1(193.83,23.5)
  SIG2 w0.152: v1(6.56,27.27) 12.16,27.27 12.63,27.74 18.14,27.74 20.17,25.7 191.62,25.7 v1(193.83,23.5)
  BOTTOM w0.152: U1.24 v1(6.56,27.27)
INA_19: length 192.6
  TOP w0.152: v1(197.99,23.5) 196.93,23.5 ; v1(11.86,27.77) 12.26,28.17 v1(17.78,28.17)
  SIG2 w0.152: v1(17.78,28.17) 18.77,28.17 20.32,26.62 192.33,26.62 195.45,23.5 v1(197.99,23.5)
  BOTTOM w0.152: R39.1 13.76,28.02 13.52,27.77 U1.25 v1(11.86,27.77)
INA_20: length 192.5
  TOP w0.152: J1.B14 v1(194.87,24.77)
  SIG1 w0.152: v1(8.48,27.77) 8.92,27.34 12.61,27.34 13,27.74 20.09,27.74 20.7,27.13 192.51,27.13 v1(194.87,24.77)
  BOTTOM w0.152: v1(8.48,27.77) U1.26 5.78,27.77 5.49,28.07 R41.1
INA_21: length 192.5
  TOP w0.152: v1(11.86,28.77) 14.19,28.77 14.43,29.01 R43.1 ; v1(197.99,26.04) 196.93,26.04
  SIG1 w0.152: v1(197.99,26.04) 195.76,26.04 193.78,28.02 21.01,28.02 20.25,28.77 v1(11.86,28.77)
  BOTTOM w0.152: U1.29 v1(11.86,28.77)
INA_22: length 192.8
  TOP w0.152: v1(193.34,27.3) J1.B16 ; v1(8.58,28.77) 5.77,28.77 5.49,29.06 R45.1
  SIG2 w0.152: v1(8.58,28.77) 9.08,28.27 13.11,28.27 13.44,28.6 19.74,28.6 20.74,27.59 193.06,27.59 v1(193.34,27.3)
  BOTTOM w0.152: U1.30 v1(8.58,28.77)
INA_23: length 188.5
  TOP w0.152: v1(197.99,27.3) J1.A16
  SIG2 w0.152: v1(197.99,27.3) 194.21,27.3 192.99,28.52 21.13,28.52 20.39,29.27 v1(13.7,29.27)
  BOTTOM w0.152: R47.1 14.43,29.51 14.18,29.27 v1(13.7,29.27) U1.31
INA_24: length 192.5
  TOP w0.152: v1(193.98,28.57) 195.66,28.57
  SIG1 w0.152: v1(6.62,29.27) 12.48,29.27 13,29.79 20.42,29.79 21.21,29.01 193.55,29.01 v1(193.98,28.57)
  BOTTOM w0.152: R49.1 6.32,29.57 v1(6.62,29.27) U1.32
INA_25: length 188.6
  TOP w0.152: v1(13.67,30.77) 14.21,30.77 14.43,30.56 R51.1 ; v1(197.99,28.57) 196.93,28.57
  SIG1 w0.152: v1(197.99,28.57) 195.33,28.57 194.59,29.31 193.83,29.31 193.17,29.97 21.46,29.97 20.95,30.48 13.95,30.48 v1(13.67,30.77)
  BOTTOM w0.152: U1.35 v1(13.67,30.77)
INA_26: length 192.4
  TOP w0.152: R53.1 5.49,30.56 5.7,30.77 v1(6.68,30.77) ; v1(194.11,29.84) J1.B18
  SIG2 w0.152: v1(194.11,29.84) 193.7,29.44 21.49,29.44 20.77,30.15 7.3,30.15 v1(6.68,30.77)
  BOTTOM w0.152: U1.36 v1(6.68,30.77)
INA_27: length 191
  TOP w0.152: v1(197.99,29.84) J1.A18
  SIG2 w0.152: v1(197.99,29.84) 195.07,29.84 194.44,30.48 21.72,30.48 20.93,31.27 v1(11.86,31.27)
  BOTTOM w0.152: v1(11.86,31.27) U1.37 14.22,31.27 14.43,31.06 R55.1
INA_28: length 191.4
  TOP w0.152: v1(194.89,31.11) 195.66,31.11
  SIG1 w0.152: v1(194.89,31.11) 194.49,31.11 194.39,31.01 21.87,31.01 21.61,31.27 13.1,31.27 12.6,30.76 8.97,30.76 v1(8.46,31.27)
  BOTTOM w0.152: R57.1 5.49,31.09 5.67,31.27 U1.38 v1(8.46,31.27)
INA_29: length 191.8
  TOP w0.152: v1(11.86,32.27) 14.21,32.27 14.43,32.05 R59.1 ; 196.93,31.11 v1(197.99,31.11)
  SIG1 w0.152: v1(11.86,32.27) 193.76,32.27 194.36,31.67 197.43,31.67 v1(197.99,31.11)
  BOTTOM w0.152: U1.41 v1(11.86,32.27)
INA_30: length 192.2
  TOP w0.152: v1(8.5,32.27) 5.68,32.27 5.49,32.08 R61.1 ; v1(194.26,32.38) J1.B20
  SIG2 w0.152: v1(194.26,32.38) 193.62,31.75 9.02,31.75 v1(8.5,32.27)
  BOTTOM w0.152: U1.42 v1(8.5,32.27)
INA_31: length 188.1
  TOP w0.152: v1(197.99,33.66) J1.A21
  SIG2 w0.152: v1(13.67,32.77) 193.3,32.77 194.18,33.66 v1(197.99,33.66)
  BOTTOM w0.152: R63.1 14.43,32.56 14.22,32.77 v1(13.67,32.77) U1.43
INA_32: length 192.6
  TOP w0.152: J1.B22 v1(194.41,34.92)
  SIG2 w0.152: v1(6.68,32.77) 7.09,32.77 7.09,32.77 12.47,32.77 13.04,33.34 192.82,33.34 v1(194.41,34.92)
  BOTTOM w0.152: U1.44 v1(6.68,32.77) 5.77,32.77 5.49,32.49 R65.1
INA_33: length 192.3
  TOP w0.152: v1(197.99,34.92) J1.A22 ; R4.1 14.43,33.55 14.14,33.27 v1(11.86,33.27)
  SIG1 w0.152: v1(197.99,34.92) 196.34,34.92 194.44,33.02 14.53,33.02 14.28,33.27 v1(11.86,33.27)
  BOTTOM w0.152: U1.45 v1(11.86,33.27)
INA_34: length 193.5
  TOP w0.152: R6.1 5.49,33.58 5.8,33.27 v1(8.48,33.27) ; v1(193.73,36.2) 195.66,36.2
  SIG1 w0.152: v1(8.48,33.27) 9.42,34.2 14.62,34.2 15.16,33.66 191.19,33.66 v1(193.73,36.2)
  BOTTOM w0.152: U1.46 v1(8.48,33.27)
INA_35: length 188.8
  TOP w0.152: v1(197.99,36.2) 196.93,36.2
  SIG2 w0.152: v1(197.99,36.2) 194.64,36.2 192.5,34.06 19.96,34.06 19.73,33.83 13.73,33.83 v1(13.67,33.77)
  BOTTOM w0.152: R2.1 13.96,34.06 v1(13.67,33.77) U1.47
INA_36: length 193.3
  TOP w0.152: v1(194.03,37.47) J1.B24
  SIG2 w0.152: v1(194.03,37.47) 191.21,34.65 18.8,34.65 18.39,34.24 13.49,34.24 13.45,34.2 7.11,34.2 v1(6.68,33.77)
  BOTTOM w0.152: R10.1 5.49,33.99 5.7,33.77 v1(6.68,33.77) U1.48
INA_37: length 189.2
  TOP w0.152: R12.1 14.43,35.05 14.15,34.77 v1(13.67,34.77) ; v1(197.99,37.47) J1.A24
  SIG1 w0.152: v1(13.67,34.77) 15.14,34.77 15.54,34.37 190.2,34.37 192.53,36.7 197.23,36.7 v1(197.99,37.47)
  BOTTOM w0.152: U1.51 v1(13.67,34.77)
INA_38: length 193.7
  TOP w0.152: v1(192.99,38.73) J1.B25 ; R14.1 5.49,35.08 5.8,34.77 v1(6.68,34.77)
  SIG1 w0.152: v1(192.99,38.73) 189.15,34.9 16.13,34.9 15.77,35.26 13,35.26 12.52,34.77 v1(6.68,34.77)
  BOTTOM w0.152: U1.52 v1(6.68,34.77)
INA_39: length 192
  TOP w0.152: v1(197.99,38.73) J1.A25
  SIG2 w0.152: v1(197.99,38.73) 197.33,38.07 193.19,38.07 190.27,35.15 14.22,35.15 14.11,35.27 v1(11.86,35.27)
  BOTTOM w0.152: R16.1 14.43,35.56 14.14,35.27 U1.53 v1(11.86,35.27)
INA_40: length 192.8
  TOP w0.152: J1.B26 v1(193.07,40.01)
  SIG2 w0.152: v1(8.46,35.27) 11.28,35.27 11.43,35.42 11.43,35.45 11.68,35.7 23.43,35.7 23.77,36.04 189.1,36.04 v1(193.07,40.01)
  BOTTOM w0.152: v1(8.46,35.27) U1.54 5.7,35.27 5.49,35.48 R18.1
INA_41: length 194.2
  TOP w0.152: v1(11.86,36.77) 14.28,36.77 14.43,36.63 R20.1 ; 196.93,41.27 v1(197.99,41.27)
  SIG1 w0.152: v1(197.99,41.27) 193.17,41.27 187.4,35.51 17.27,35.51 16.01,36.77 v1(11.86,36.77)
  BOTTOM w0.152: U1.57 v1(11.86,36.77)
INA_42: length 194.5
  TOP w0.152: J1.B28 v1(193.22,42.55) ; v1(8.46,36.77) 5.6,36.77 5.49,36.65 R22.1
  SIG2 w0.152: v1(193.22,42.55) 187.68,37.01 22.99,37.01 22.25,36.27 8.96,36.27 v1(8.46,36.77)
  BOTTOM w0.152: U1.58 v1(8.46,36.77)
INA_43: length 190.4
  TOP w0.152: J1.A28 v1(197.99,42.55)
  SIG2 w0.152: v1(13.67,37.27) 21.7,37.27 22.28,37.85 186.31,37.85 191.62,43.15 196.47,43.15 197.08,42.55 v1(197.99,42.55)
  BOTTOM w0.152: R24.1 14.43,37.13 14.29,37.27 v1(13.67,37.27) U1.59
INA_44: length 195.4
  TOP w0.152: J1.B29 v1(193.4,43.81)
  SIG1 w0.152: v1(193.4,43.81) 186.11,36.53 17.3,36.53 16.12,37.7 7.11,37.7 v1(6.68,37.27)
  BOTTOM w0.152: R26.1 5.49,37.06 5.7,37.27 v1(6.68,37.27) U1.60
INA_45: length 191.2
  TOP w0.152: R28.1 14.43,38.13 14.28,38.27 v1(13.67,38.27) ; J1.A29 v1(197.99,43.81)
  SIG1 w0.152: v1(13.67,38.27) 16.88,38.27 17.81,37.34 184.86,37.34 191.87,44.35 196.14,44.35 196.67,43.81 v1(197.99,43.81)
  BOTTOM w0.152: U1.63 v1(13.67,38.27)
INA_46: length 194.9
  TOP w0.152: R30.1 5.49,38.15 5.61,38.27 v1(6.68,38.27) ; J1.B30 v1(191.67,45.09)
  SIG2 w0.152: v1(6.68,38.27) 7.16,37.8 21.08,37.8 22.05,38.76 185.34,38.76 v1(191.67,45.09)
  BOTTOM w0.152: U1.64 v1(6.68,38.27)
INA_47: length 193.5
  TOP w0.152: J1.A30 v1(197.99,45.09)
  SIG2 w0.152: v1(197.99,45.09) 197.28,45.09 196.65,45.72 190.12,45.72 184.15,39.75 21.41,39.75 20.43,38.77 v1(11.86,38.77)
  BOTTOM w0.152: R32.1 14.43,38.63 14.29,38.77 U1.65 v1(11.86,38.77)
INA_48: length 194.7
  TOP w0.152: J1.B31 v1(191.87,46.35)
  SIG1 w0.152: v1(191.87,46.35) 183.85,38.33 18.31,38.33 17.81,38.84 13,38.84 12.64,39.2 11.44,39.2 11.01,38.77 v1(8.46,38.77)
  BOTTOM w0.152: v1(8.46,38.77) U1.66 5.7,38.77 5.49,38.56 R34.1
INA_49: length 191.2
  TOP w0.152: v1(13.72,39.27) 14.07,39.62 R36.1 ; J1.A31 v1(197.99,46.35)
  SIG1 w0.152: v1(13.72,39.27) 182.37,39.27 190.09,46.99 196.09,46.99 196.72,46.35 v1(197.99,46.35)
  BOTTOM w0.152: U1.67 v1(13.72,39.27)
INA_50: length 195.3
  TOP w0.152: v1(6.68,39.27) 5.89,39.27 5.51,39.65 R38.1 ; J1.B32 v1(189.41,47.62)
  SIG2 w0.152: v1(6.68,39.27) 7.09,39.27 7.11,39.29 12.5,39.29 12.9,39.7 19.58,39.7 20.7,40.82 182.6,40.82 v1(189.41,47.62)
  BOTTOM w0.152: U1.68 v1(6.68,39.27)
INA_51: length 194.3
  TOP w0.152: v1(197.99,48.9) 196.93,48.9
  SIG1 w0.152: v1(11.86,39.77) 12.27,39.77 12.28,39.78 15.32,39.78 15.72,40.18 180.75,40.18 189.46,48.9 v1(197.99,48.9)
  BOTTOM w0.152: R40.1 14.43,40.13 14.06,39.77 U1.69 v1(11.86,39.77)
INA_52: length 195.2
  TOP w0.152: v1(189.71,50.16) J1.B34
  SIG2 w0.152: v1(8.46,39.77) 8.97,40.28 18.29,40.28 19.68,41.68 181.23,41.68 v1(189.71,50.16)
  BOTTOM w0.152: R42.1 5.49,40.06 5.77,39.77 U1.70 v1(8.46,39.77)
INA_53: length 195.8
  TOP w0.152: v1(197.99,50.16) J1.A34 ; v1(11.86,40.77) 14.07,40.77 14.43,41.12 R44.1
  SIG2 w0.152: v1(197.99,50.16) 197.15,50.16 196.55,50.77 188.11,50.77 179.96,42.62 18.67,42.62 16.82,40.77 v1(11.86,40.77)
  BOTTOM w0.152: U1.73 v1(11.86,40.77)
INA_54: length 196.6
  TOP w0.152: R46.1 5.49,41.15 5.86,40.77 v1(8.46,40.77) ; v1(189.92,51.44) 195.66,51.44
  SIG1 w0.152: v1(8.46,40.77) 10.76,40.77 11.2,40.34 14.43,40.34 15.29,41.2 179.68,41.2 v1(189.92,51.44)
  BOTTOM w0.152: U1.74 v1(8.46,40.77)
INA_55: length 192.5
  TOP w0.152: v1(197.99,51.44) 196.93,51.44
  SIG1 w0.152: v1(13.67,41.27) 14.32,41.27 15.14,42.09 178.38,42.09 188.34,52.04 196.27,52.04 196.88,51.44 v1(197.99,51.44)
  BOTTOM w0.152: R48.1 14.03,41.63 v1(13.67,41.27) U1.75
INA_56: length 196.5
  TOP w0.152: v1(187.88,52.7) J1.B36
  SIG2 w0.152: v1(6.68,41.27) 7.57,42.16 16.21,42.16 17.58,43.54 178.71,43.54 v1(187.88,52.7)
  BOTTOM w0.152: R50.1 5.49,41.55 5.77,41.27 v1(6.68,41.27) U1.76
INA_57: length 192.3
  TOP w0.152: R52.1 14.43,42.77 14.42,42.77 v1(13.67,42.77) ; v1(197.99,52.7) J1.A36
  SIG2 w0.152: v1(13.67,42.77) 14.7,42.77 16.64,44.7 177.98,44.7 186.59,53.31 196.29,53.31 196.9,52.7 v1(197.99,52.7)
  BOTTOM w0.152: U1.79 v1(13.67,42.77)
INA_58: length 196.9
  TOP w0.152: R54.1 5.49,42.77 5.49,42.77 v1(6.68,42.77) ; v1(188.29,53.98) 195.66,53.98
  SIG1 w0.152: v1(6.68,42.77) 7.39,42.06 13.89,42.06 14.91,43.08 177.39,43.08 v1(188.29,53.98)
  BOTTOM w0.152: U1.80 v1(6.68,42.77)
INA_59: length 195.3
  TOP w0.152: v1(197.99,53.98) 196.93,53.98
  SIG1 w0.152: v1(197.99,53.98) 196.9,53.98 196.24,54.64 186.97,54.64 176.33,43.99 14.71,43.99 13.98,43.27 v1(11.86,43.27)
  BOTTOM w0.152: R56.1 14.43,43.26 14.41,43.27 U1.81 v1(11.86,43.27)
INA_60: length 195.8
  TOP w0.152: v1(186.44,55.24) J1.B38
  SIG2 w0.152: v1(8.46,43.27) 8.93,43.74 13.84,43.74 16.05,45.95 177.14,45.95 v1(186.44,55.24)
  BOTTOM w0.152: v1(8.46,43.27) U1.82 5.7,43.27 5.49,43.05 R58.1
INA_61: length 196.8
  TOP w0.152: v1(197.99,56.52) 196.93,56.52 ; v1(11.86,44.27) 14.42,44.27 14.43,44.27 R60.1
  SIG1 w0.152: v1(197.99,56.52) 196.95,56.52 196.34,57.12 184.48,57.12 173.89,46.53 14.12,46.53 v1(11.86,44.27)
  BOTTOM w0.152: U1.85 v1(11.86,44.27)
INA_62: length 197.1
  TOP w0.152: v1(8.46,44.27) 5.49,44.27 5.49,44.27 R62.1 ; v1(186.56,56.52) 195.66,56.52
  SIG1 w0.152: v1(186.56,56.52) 175.34,45.29 15.11,45.29 13.66,43.84 8.89,43.84 v1(8.46,44.27)
  BOTTOM w0.152: U1.86 v1(8.46,44.27)
INA_63: length 193
  TOP w0.152: v1(197.99,57.78) J1.A40
  SIG2 w0.152: v1(13.67,44.77) 16.29,47.4 176.15,47.4 185.88,57.12 196.44,57.12 197.1,57.78 v1(197.99,57.78)
  BOTTOM w0.152: R64.1 14.43,44.78 14.42,44.77 v1(13.67,44.77) U1.87
INA_64: length 197.1
  TOP w0.152: v1(183.92,57.78) J1.B40
  SIG2 w0.152: v1(183.92,57.78) 174.52,48.39 10.3,48.39 v1(6.68,44.77)
  BOTTOM w0.152: U1.88 v1(6.68,44.77) 5.7,44.77 5.49,44.55 R66.1
N01819: length 2.4
  TOP w0.152: v1(197.97,8.26) 196.93,8.26
  BOTTOM w0.152: R7.2 v1(197.97,8.26)
N01997: length 3.6
  TOP w0.152: R3.1 J1.B2

## Copper pours and planes (outline as drawn; the poured copper is in the pictures)
GND on TOP, BOTTOM: 183.9,1.02 183.9,65.02 202.18,65.02 202.18,1.02
GND on TOP, BOTTOM: 1.02,8.64 1.02,57.4 19.3,57.4 19.3,8.64
GND on GND1, GND2: 1.02,8.64 19.3,8.64 19.3,16.26 173.99,16.26 183.9,6.35 183.9,1.02 202.18,1.02 202.18,65.02 183.9,65.02 183.9,59.69 173.99,49.78 19.3,49.78 19.3,57.4 1.02,57.4
